# Altium PCB PCB-15_19_prototyp.PcbDoc (part 2 of 4)
Units mm, origin at the board's own origin, x right, y up, seen from the top; angles counter-clockwise.
Board outline 190 x 150 mm, 8 copper layers (Top Layer, VCC3V3, Internal Plane 1, Internal Plane 2, Mid-Layer 1, GND, Mid-Layer 2, Bottom Layer), stack 1.301 mm thick; 129 components, 396 nets, 1206 pads, 700 vias.
Unrouted connection lines stored in the file: 9.
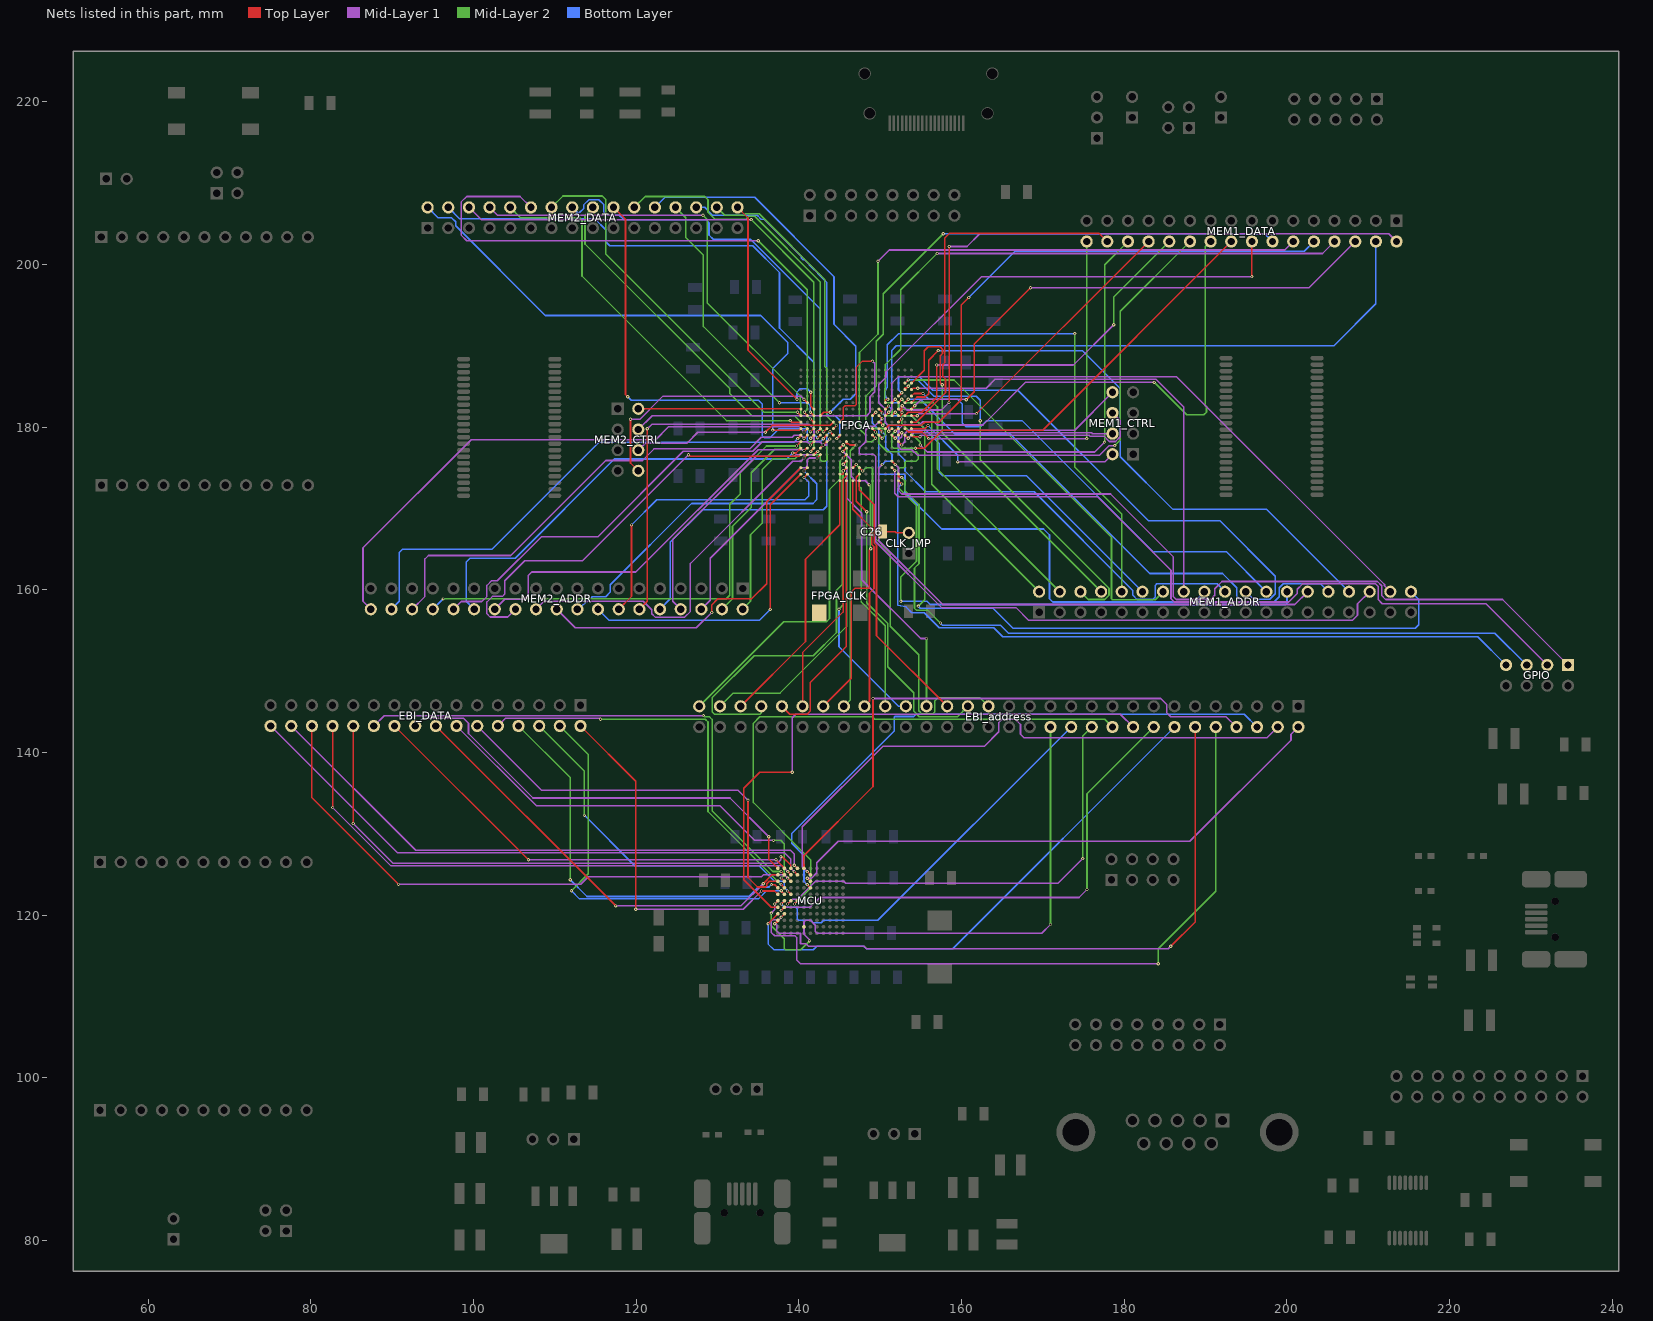
[diagram p8: the nets of this part, all layers, seen from the top]

## Via types
v1: diameter 0.4, hole 0.2, Top Layer to Bottom Layer, 696 vias
v2: diameter 7, hole 5, Top Layer to Bottom Layer, 4 vias

## Nets (pads, with @x,y where several pads share a name; then routed paths per layer and width w, separated by ;. In a path a pad name is that pad's centre, name@x,y a point inside that pad or via, vN(x,y) a via of type N, cw(c..) or ccw(c..) an arc to the next point about the centre after c; other vN are vias at no path point) (continued)
A17: EBI_address.26 MCU.F1 | length 69.4
  Top Layer w0.2: v1(137.036,121.361) MCU.F1@137.429,121.754
  Mid-Layer 1 w0.2: v1(136.601,120.244) 137.036,120.679 v1(137.036,121.361) ; v1(141.326,116.829) 141.326,116.942 140.64,117.628 140.64,119.177 140.811,119.348 141.427,119.348 142.011,118.764 142.011,117.983 142.24,117.754 169.849,117.754 v1(170.942,118.847)
  Mid-Layer 2 w0.2: v1(136.601,120.244) 136.627,120.218 136.627,118.685 138.216,117.095 138.216,115.898 138.379,115.735 140.231,115.735 v1(141.326,116.829) ; v1(170.942,118.847) EBI_address.26@170.942,143.129
A18: EBI_address.24 MCU.F2 | length 47.8
  Top Layer w0.2: v1(137.846,121.361) 137.846,121.371 MCU.F2@138.229,121.754
  Bottom Layer w0.2: v1(137.846,121.361) 138.252,120.955 139.598,120.955 139.829,120.724 139.829,119.482 139.957,119.354 141.453,119.354 141.731,119.075 142.747,119.075 143.023,119.351 149.704,119.351 EBI_address.24@173.482,143.129
A19: EBI_address.22 MCU.F3 | length 56
  Top Layer w0.2: v1(138.608,121.361) 138.636,121.361 MCU.F3@139.029,121.754
  Mid-Layer 1 w0.2: v1(138.608,121.361) 139.217,121.971 139.871,121.971 142.055,124.154 145.518,124.154 145.759,123.912 171.868,123.912 v1(174.904,126.949)
  Mid-Layer 2 w0.2: v1(174.904,126.949) 174.904,142.011 EBI_address.22@176.022,143.129
A20: EBI_address.20 MCU.F4 | length 71.5
  Top Layer w0.2: v1(139.471,121.361) 139.471,121.396 MCU.F4@139.829,121.754
  Mid-Layer 2 w0.2: v1(139.471,121.361) 141.478,123.368 141.478,126.771 134.417,133.833 134.417,143.586 135.21,144.379 149.047,144.379 149.332,144.094 177.597,144.094 EBI_address.20@178.562,143.129
A21: EBI_address.18 MCU.G1 | length 73.1
  Top Layer w0.2: MCU.G1@137.429,120.954 136.627,120.954 133.223,124.358 133.223,135.585 135.204,137.566 v1(139.192,137.566)
  Mid-Layer 1 w0.2: v1(139.192,137.566) 139.192,144.272 139.624,144.704 179.527,144.704 EBI_address.18@181.102,143.129
A22: EBI_address.16 MCU.G2 | length 62.6
  Top Layer w0.2: v1(137.82,120.574) 137.849,120.574 MCU.G2@138.229,120.954
  Mid-Layer 1 w0.2: v1(137.82,120.574) 138.201,120.955 141.372,120.955 142.578,122.16 174.459,122.16 v1(175.438,123.139)
  Mid-Layer 2 w0.2: v1(175.438,123.139) 175.438,134.925 EBI_address.16@183.642,143.129
A23: EBI_address.14 MCU.H1 | length 66.1
  Top Layer w0.2: v1(136.22,118.945) MCU.H1@137.429,120.154
  Bottom Layer w0.2: v1(136.22,118.945) 136.22,116.455 136.941,115.735 141.784,115.735 142.229,116.18 147.996,116.18 148.315,115.861 158.914,115.861 EBI_address.14@186.182,143.129
A24: EBI_address.12 MCU.J1 | length 80.2
  Top Layer w0.2: v1(137.033,118.948) 137.236,119.151 137.429,119.151 MCU.J1@137.429,119.354 ; v1(185.725,116.154) 188.722,119.151 EBI_address.12@188.722,143.129
  Mid-Layer 1 w0.2: v1(137.033,118.948) 137.16,118.948 137.287,118.821 137.287,118.033 137.566,117.754 139.598,117.754 140.198,117.754 140.198,116.476 140.876,116.476 141.198,116.154 148.021,116.154 148.315,115.861 185.431,115.861 v1(185.725,116.154)
A25: EBI_address.10 MCU.H2 | length 86.2
  Top Layer w0.2: v1(137.82,119.736) 138.229,120.144 MCU.H2@138.229,120.154
  Mid-Layer 1 w0.2: v1(137.82,119.736) 137.82,119.685 137.566,119.431 136.754,119.431 136.627,119.304 136.627,117.856 137.033,117.45 139.522,117.45 139.725,117.246 139.725,114.503 140.208,114.021 v1(184.201,114.021)
  Mid-Layer 2 w0.2: v1(184.201,114.021) 184.201,115.875 191.262,122.936 EBI_address.10@191.262,143.129
BACKUP.GPIO0: FPGA.R15 GPIO.1 | length 101
  Top Layer w0.2: FPGA.R15@151.447,175.807 v1(151.842,175.412)
  Mid-Layer 1 w0.2: v1(151.842,175.412) 152.247,175.007 152.247,172.192 152.668,171.771 178.318,171.771 186.055,164.033 186.055,159.131 186.385,158.801 190.627,158.801 191.135,159.309 191.135,160.122 192.029,161.016 211.135,161.016 211.658,160.493 211.658,159.283 212.141,158.801 226.517,158.801 GPIO.1@234.569,150.749
BACKUP.GPIO1: FPGA.T15 GPIO.3 | length 97.4
  Top Layer w0.2: FPGA.T15@151.447,175.007 v1(151.779,174.675)
  Mid-Layer 1 w0.2: v1(151.779,174.675) 151.779,171.868 152.229,171.418 176.714,171.418 185.75,162.382 185.75,158.902 186.157,158.496 200.228,158.496 201.27,159.537 201.27,160.071 201.915,160.716 210.922,160.716 211.226,160.411 211.226,158.801 211.734,158.293 224.485,158.293 GPIO.3@232.029,150.749
BACKUP.GPIO2: FPGA.U16 GPIO.5 | length 96.1
  Top Layer w0.2: FPGA.U16@152.247,174.207 152.247,173.914 152.527,173.914 v1(152.654,173.787)
  Mid-Layer 2 w0.2: v1(152.654,173.787) 153.054,173.387 153.054,172.853 153.041,172.841 153.041,172.212 154.774,170.479 154.774,163.209 154.229,162.664 154.229,157.704 154.432,157.501 155.808,157.501 v1(157.404,155.905)
  Bottom Layer w0.2: v1(157.404,155.905) 157.658,155.651 164.795,155.651 165.786,154.661 225.577,154.661 GPIO.5@229.489,150.749
BACKUP.GPIO3: FPGA.V16 GPIO.7 | length 93.5
  Top Layer w0.2: FPGA.V16@152.247,173.407 v1(152.654,173)
  Bottom Layer w0.2: v1(152.654,173) 152.152,172.498 152.152,158.09 153.187,157.886 153.899,157.175 155.423,157.175 157.277,155.321 163.982,155.321 165.075,154.229 223.469,154.229 GPIO.7@226.949,150.749
CLK: C26.2 CLK_JMP.2 | length 3.3
  Top Layer w0.2: C26.2@150.321,167.148 151.841,167.148 151.99,166.999 CLK_JMP.2@153.524,166.999
CS0: EBI_address.6 MCU.D6 | length 72.6
  Top Layer w0.2: v1(141.021,123.749) 141.034,123.749 MCU.D6@141.429,123.354
  Bottom Layer w0.2: v1(141.021,123.749) 140.633,124.136 140.633,126.232 140.595,126.27 140.595,127.338 139.116,128.818 139.116,130.032 151.724,142.64 151.724,144.332 151.81,144.419 154.127,144.419 154.412,144.704 194.767,144.704 EBI_address.6@196.342,143.129
CS1: EBI_address.8 MCU.A5 | length 71.2
  Top Layer w0.2: MCU.A5@140.629,125.754 140.629,126.27 140.595,126.303 140.595,127.286 149.123,135.814 v1(149.123,146.634)
  Mid-Layer 1 w0.2: v1(149.123,146.634) 184.506,146.634 185.217,145.923 185.217,144.907 185.725,144.399 192.532,144.399 EBI_address.8@193.802,143.129
DATA0: EBI_DATA.32 MCU.B4 | length 73
  Top Layer w0.2: v1(139.421,125.349) 139.434,125.349 MCU.B4@139.829,124.954
  Mid-Layer 1 w0.2: EBI_DATA.32@75.057,143.256 90.653,127.66 138.242,127.66 139.029,126.873 139.029,125.741 v1(139.421,125.349)
DATA0.ADDR0: FPGA.F15 MEM1_ADDR.2 | length 33.5
  Top Layer w0.2: FPGA.F15@151.447,183.007 v1(151.847,183.407)
  Mid-Layer 2 w0.2: v1(151.847,183.407) 152.247,183.008 152.247,182.36 152.394,182.213 153.079,182.213 153.086,182.207 155.715,182.207 156.356,181.566 156.356,172.955 MEM1_ADDR.2@169.545,159.766
DATA0.ADDR1: FPGA.F16 MEM1_ADDR.4 | length 34.3
  Top Layer w0.2: FPGA.F16@152.247,183.007 v1(152.654,183.413)
  Mid-Layer 2 w0.2: v1(152.654,183.413) 153.06,183.007 153.835,183.007 153.854,183.026 156.496,183.026 157.048,182.474 157.048,174.803 MEM1_ADDR.4@172.085,159.766
DATA0.ADDR2: FPGA.C17 MEM1_ADDR.6 | length 45.1
  Top Layer w0.2: FPGA.C17@153.047,185.407 v1(153.441,185.801)
  Mid-Layer 2 w0.2: v1(162.306,180.772) 162.306,175.997 178.13,160.172 178.13,159.309 177.622,158.801 175.59,158.801 MEM1_ADDR.6@174.625,159.766
  Bottom Layer w0.2: v1(153.441,185.801) 154.615,185.801 156.621,183.794 161.798,183.794 162.306,183.286 v1(162.306,180.772)
DATA0.ADDR3: FPGA.C18 MEM1_ADDR.8 | length 45.3
  Top Layer w0.2: FPGA.C18@153.847,185.407 155.423,186.983 155.423,189.382 155.905,189.865 157.378,189.865 157.658,189.586 157.658,189.052 157.378,188.773 157.378,185.445 v1(157.632,185.191)
  Mid-Layer 2 w0.2: v1(157.632,185.191) 157.632,179.299 MEM1_ADDR.8@177.165,159.766
DATA0.ADDR4: FPGA.F14 MEM1_ADDR.10 | length 65.3
  Top Layer w0.2: FPGA.F14@150.647,183.007 150.647,183.261 150.8,183.413 v1(150.952,183.413)
  Mid-Layer 2 w0.2: v1(173.939,191.491) 173.939,175.082 179.705,169.316 MEM1_ADDR.10@179.705,159.766
  Bottom Layer w0.2: v1(150.952,183.413) 150.622,183.744 150.622,184.607 150.876,184.861 150.876,190.119 152.248,191.491 v1(173.939,191.491)
DATA0.ADDR5: FPGA.G14 MEM1_ADDR.12 | length 43.7
  Top Layer w0.2: FPGA.G14@150.647,182.207 v1(151.034,182.595)
  Bottom Layer w0.2: v1(151.034,182.595) 151.46,182.169 151.46,181.534 151.587,181.407 153.86,181.407 157.277,177.991 157.277,174.422 157.683,174.015 167.996,174.015 MEM1_ADDR.12@182.245,159.766
DATA0.ADDR6: FPGA.D17 MEM1_ADDR.14 | length 48.4
  Top Layer w0.2: FPGA.D17@153.047,184.607 153.047,184.81 153.238,184.81 v1(153.441,185.014)
  Mid-Layer 2 w0.2: v1(153.441,185.014) 154.222,185.795 159.085,185.795 178.435,166.444 178.435,158.902 178.55,158.788 183.807,158.788 MEM1_ADDR.14@184.785,159.766
DATA0.ADDR7: FPGA.D18 MEM1_ADDR.16 | length 58.1
  Top Layer w0.2: FPGA.D18@153.847,184.607 154.025,184.785 v1(154.61,184.785)
  Mid-Layer 1 w0.2: v1(154.61,184.785) 163.043,184.785 164.16,185.903 183.896,185.903 187.325,182.474 MEM1_ADDR.16@187.325,159.766
DATA0.ADDR8: FPGA.H12 MEM1_ADDR.18 | length 61.5
  Top Layer w0.2: FPGA.H12@149.047,181.407 v1(149.454,181.813)
  Bottom Layer w0.2: v1(149.454,181.813) 149.047,181.407 149.047,180.467 149.835,179.679 149.835,174.334 149.962,174.207 152.908,174.207 153.054,174.061 153.054,172.841 153.041,172.828 153.041,171.98 157.559,167.462 170.078,167.462 170.815,166.726 170.815,158.902 171.221,158.496 188.595,158.496 MEM1_ADDR.18@189.865,159.766
DATA0.ADDR9: FPGA.G13 MEM1_ADDR.20 | length 57.9
  Top Layer w0.2: FPGA.G13@149.847,182.207 150.241,181.813 v1(150.241,181.737)
  Bottom Layer w0.2: v1(150.241,181.737) 150.647,181.331 150.647,180.518 150.926,180.238 152.044,180.238 152.248,180.035 152.248,176.708 153.047,175.908 153.047,174.6 155.612,172.034 168.935,172.034 181.077,159.893 181.077,159.309 181.585,158.801 183.515,158.801 183.82,159.106 183.82,160.528 184.023,160.731 191.44,160.731 MEM1_ADDR.20@192.405,159.766
DATA0.ADDR10: FPGA.E16 MEM1_ADDR.22 | length 65.6
  Top Layer w0.2: FPGA.E16@152.247,183.807 v1(152.647,184.207)
  Bottom Layer w0.2: v1(152.647,184.207) 152.247,184.608 152.247,186.054 152.4,186.207 154.788,186.207 156.464,184.531 166.929,184.531 182.956,168.504 191.745,168.504 198.577,161.671 198.577,159.512 197.881,158.816 195.895,158.816 MEM1_ADDR.22@194.945,159.766
DATA0.ADDR11: FPGA.E18 MEM1_ADDR.24 | length 55.9
  Top Layer w0.2: FPGA.E18@153.847,183.807 154.173,184.133 v1(155.27,184.133)
  Bottom Layer w0.2: v1(155.27,184.133) 155.964,183.439 159.512,183.439 160.071,182.88 160.071,180.518 160.528,180.061 162.357,180.061 163.093,180.797 167.437,180.797 183.54,164.694 192.557,164.694 MEM1_ADDR.24@197.485,159.766
DATA0.ADDR12: FPGA.K12 MEM1_ADDR.26 | length 78.5
  Top Layer w0.2: FPGA.K12@149.047,179.807 149.428,179.426 v1(149.428,179.4)
  Mid-Layer 2 w0.2: v1(149.428,179.4) 149.835,178.994 149.835,178.003 150.876,176.962 154.432,176.962 154.661,176.733 154.661,176.047 154.432,175.819 153.199,175.819 153.047,175.666 153.047,175.146 152.908,175.007 152.4,175.007 152.197,174.804 152.197,172.618 154.474,170.341 154.474,163.509 152.552,161.587 v1(152.552,158.598)
  Bottom Layer w0.2: v1(152.552,158.598) 155.753,158.598 156.159,158.191 199.847,158.191 200.025,158.369 MEM1_ADDR.26@200.025,159.766
DATA0.ADDR13: FPGA.K13 MEM1_ADDR.28 | length 72.1
  Top Layer w0.2: FPGA.K13@149.847,179.807 150.241,179.413 v1(150.241,179.4)
  Mid-Layer 1 w0.2: v1(150.241,175.387) 149.835,174.981 149.835,166.04 157.683,158.191 200.99,158.191 MEM1_ADDR.28@202.565,159.766
  Bottom Layer w0.2: v1(150.241,175.387) 150.661,175.807 151.296,175.807 151.46,175.971 151.46,176.657 150.673,177.444 150.673,178.968 v1(150.241,179.4)
DATA0.ADDR14: FPGA.F17 MEM1_ADDR.30 | length 65.1
  Top Layer w0.2: FPGA.F17@153.047,183.007 153.441,183.401 v1(153.441,183.413)
  Bottom Layer w0.2: v1(153.441,183.413) 154.915,183.413 159.182,179.146 165.989,179.146 183.134,162.001 192.1,162.001 193.853,160.249 193.853,159.207 194.544,158.516 198.435,158.516 199.06,159.141 199.06,160.249 199.542,160.731 204.14,160.731 MEM1_ADDR.30@205.105,159.766
DATA0.ADDR15: FPGA.F18 MEM1_ADDR.32 | length 76
  Top Layer w0.2: FPGA.F18@153.847,183.007 154.533,183.693 155.55,183.693 155.956,184.099 155.956,188.214 v1(157.15,189.408)
  Bottom Layer w0.2: v1(157.15,189.408) 174.854,189.408 179.527,184.734 179.527,176.352 186.004,169.875 197.536,169.875 MEM1_ADDR.32@207.645,159.766
DATA0.ADDR16: FPGA.H13 MEM1_ADDR.34 | length 86
  Top Layer w0.2: FPGA.H13@149.847,181.407 v1(150.241,181.013)
  Mid-Layer 1 w0.2: v1(150.241,181.013) 149.314,180.086 148.692,180.086 148.234,179.629 148.234,178.206 147.447,177.419 147.447,176.784 147.563,176.668 149.178,176.668 149.46,176.387 149.46,165.904 157.553,157.81 166.7,157.81 168.25,156.261 208.077,156.261 208.686,156.87 208.686,158.267 MEM1_ADDR.34@210.185,159.766
DATA0.ADDR17: FPGA.H14 MEM1_ADDR.36 | length 77
  Top Layer w0.2: FPGA.H14@150.647,181.407 v1(151.054,181.813)
  Mid-Layer 1 w0.2: v1(151.054,181.813) 151.447,182.206 151.447,185.407 152.247,186.207 153.035,186.207 153.038,186.204 186.44,186.204 212.005,160.639 212.005,160.486 MEM1_ADDR.36@212.725,159.766
DATA0.ADDR18: FPGA.H15 MEM1_ADDR.38 | length 94.5
  Top Layer w0.2: FPGA.H15@151.447,181.407 151.853,181.813 v1(151.867,181.813)
  Mid-Layer 2 w0.2: v1(151.867,181.813) 152.273,181.407 153.86,181.407 155.467,179.8 155.467,158.769 v1(154.686,157.988)
  Bottom Layer w0.2: v1(154.686,157.988) 154.94,157.734 163.881,157.734 166.345,155.27 215.798,155.27 216.23,155.702 216.23,158.801 MEM1_ADDR.38@215.265,159.766
DATA0.BUS0: FPGA.H16 MEM1_DATA.2 | length 83.1
  Top Layer w0.2: FPGA.H16@152.247,181.407 152.502,181.407 152.629,181.534 152.629,182.524 v1(152.73,182.626) ; v1(158.471,183.032) 158.496,183.058 v1(158.496,202.209)
  Mid-Layer 1 w0.2: v1(152.73,182.626) 153.264,182.093 157.531,182.093 v1(158.471,183.032) ; v1(158.496,202.209) 160.68,202.209 162.255,203.784 212.522,203.784 MEM1_DATA.2@213.487,202.819
DATA0.BUS1: FPGA.G16 MEM1_DATA.4 | length 78.6
  Top Layer w0.2: FPGA.G16@152.247,182.207 152.286,182.207 v1(152.679,181.813)
  Bottom Layer w0.2: v1(152.679,181.813) 152.679,182.016 152.298,182.397 152.298,182.905 152.197,183.007 151.599,183.007 151.447,183.159 151.447,189.445 151.994,189.992 205.791,189.992 210.947,195.148 MEM1_DATA.4@210.947,202.819
DATA0.BUS2: FPGA.G18 MEM1_DATA.6 | length 66.6
  Top Layer w0.2: FPGA.G18@153.847,182.207 v1(154.266,182.626) ; v1(160.579,183.363) 161.569,184.353 161.569,190.221 v1(168.478,197.129)
  Mid-Layer 1 w0.2: v1(154.266,182.626) 155.072,183.432 160.509,183.432 v1(160.579,183.363) ; v1(168.478,197.129) 202.717,197.129 MEM1_DATA.6@208.407,202.819
DATA0.BUS3: FPGA.J13 MEM1_DATA.8 | length 75.5
  Top Layer w0.2: FPGA.J13@149.847,180.607 150.114,180.607 150.114,180.442 v1(150.317,180.238)
  Mid-Layer 1 w0.2: v1(156.997,201.346) 204.394,201.346 MEM1_DATA.8@205.867,202.819
  Mid-Layer 2 w0.2: v1(150.317,180.238) 150.644,180.565 150.644,181.283 150.774,181.413 151.314,181.413 151.46,181.559 151.46,182.194 151.435,182.22 151.435,182.88 151.308,183.007 150.774,183.007 150.546,183.236 150.546,184.506 150.647,184.607 150.647,187.706 152.527,189.586 152.527,196.875 v1(156.997,201.346)
DATA0.BUS4: FPGA.K14 MEM1_DATA.10 | length 69
  Top Layer w0.2: FPGA.K14@150.647,179.807 151.053,180.213 155.084,180.213 155.48,180.609 157.215,180.609 159.969,183.363 159.969,195.021 v1(160.884,195.936)
  Bottom Layer w0.2: v1(160.884,195.936) 166.573,201.625 202.133,201.625 MEM1_DATA.10@203.327,202.819
DATA0.BUS5: FPGA.L12 MEM1_DATA.12 | length 77.3
  Top Layer w0.2: FPGA.L12@149.047,179.007 v1(149.428,178.626)
  Mid-Layer 1 w0.2: v1(149.733,200.381) 151.13,201.778 199.746,201.778 MEM1_DATA.12@200.787,202.819
  Mid-Layer 2 w0.2: v1(149.428,178.626) 149.009,178.206 148.45,178.206 148.247,178.41 148.247,178.981 147.447,179.781 147.447,186.998 147.464,187.016 147.464,189.171 149.733,191.44 v1(149.733,200.381)
DATA0.BUS6: FPGA.L13 MEM1_DATA.14 | length 72.7
  Top Layer w0.2: FPGA.L13@149.847,179.007 v1(150.241,178.613)
  Mid-Layer 2 w0.2: v1(150.241,178.613) 150.647,179.019 150.647,179.629 150.444,179.832 148.742,179.832 148.247,180.327 148.247,183.82 149.504,185.077 149.504,190.551 150.374,191.42 150.374,196.399 v1(157.759,203.784)
  Bottom Layer w0.2: v1(157.759,203.784) 197.282,203.784 MEM1_DATA.14@198.247,202.819
DATA0.BUS7: FPGA.K15 MEM1_DATA.16 | length 62.9
  Top Layer w0.2: v1(151.054,179.476) 151.384,179.807 FPGA.K15@151.447,179.807 ; v1(195.707,198.501) MEM1_DATA.16@195.707,202.819
  Mid-Layer 1 w0.2: v1(151.054,179.476) 151.054,180.136 150.647,180.543 150.647,182.195 149.835,183.007 149.835,185.242 150.724,186.131 150.724,186.766 162.458,198.501 v1(195.707,198.501)
DATA0.BUS8: FPGA.K16 MEM1_DATA.18 | length 54.9
  Top Layer w0.2: v1(151.841,179.476) 152.172,179.807 FPGA.K16@152.247,179.807 ; v1(154.33,177.394) 155.421,177.394 157.657,179.629 169.977,179.629 MEM1_DATA.18@193.167,202.819
  Mid-Layer 2 w0.2: v1(151.841,179.476) 151.435,179.07 151.435,177.597 151.638,177.394 v1(154.33,177.394)
DATA0.BUS9: FPGA.L15 MEM1_DATA.20 | length 65.5
  Top Layer w0.2: FPGA.L15@151.447,179.007 v1(151.841,178.613)
  Mid-Layer 1 w0.2: v1(151.841,178.613) 152.248,179.019 152.248,179.705 152.806,180.264 154.813,180.264 155.169,180.619 156.642,180.619 156.997,180.264 162.636,180.264 167.869,185.496 v1(183.693,185.496)
  Mid-Layer 2 w0.2: v1(183.693,185.496) 187.681,181.508 189.789,181.508 190.119,181.839 190.119,182.474 189.967,182.626 189.967,202.159 MEM1_DATA.20@190.627,202.819
DATA0.BUS10: FPGA.L16 MEM1_DATA.22 | length 58.9
  Top Layer w0.2: FPGA.L16@152.247,179.007 152.539,179.299 v1(152.654,179.299)
  Mid-Layer 1 w0.2: v1(152.654,179.299) 152.654,178.817 152.247,178.41 152.247,177.572 152.603,177.216 153.899,177.216 154.584,176.53 176.974,176.53 178.168,177.724 v1(178.841,177.724)
  Mid-Layer 2 w0.2: v1(178.841,177.724) 179.527,178.41 179.527,194.259 MEM1_DATA.22@188.087,202.819
DATA0.BUS11: FPGA.H17 MEM1_DATA.24 | length 45.7
  Top Layer w0.2: FPGA.H17@153.047,181.407 153.453,181.813 155.118,181.813 156.972,183.667 v1(156.972,187.63)
  Mid-Layer 1 w0.2: v1(156.972,187.63) 173.761,187.63 v1(178.714,192.583)
  Mid-Layer 2 w0.2: v1(178.714,192.583) 178.714,195.986 MEM1_DATA.24@185.547,202.819
DATA0.BUS12: FPGA.H18 MEM1_DATA.26 | length 38
  Top Layer w0.2: FPGA.H18@153.847,181.407 v1(154.559,181.407) ; v1(161.849,181.661) MEM1_DATA.26@183.007,202.819
  Mid-Layer 1 w0.2: v1(154.559,181.407) 154.813,181.661 v1(161.849,181.661)
DATA0.BUS13: FPGA.J16 MEM1_DATA.28 | length 54.1
  Top Layer w0.2: FPGA.J16@152.247,180.607 152.64,181 v1(152.654,181)
  Mid-Layer 1 w0.2: v1(154.94,177.8) 155.807,176.933 176.374,176.933 v1(177.597,178.156)
  Mid-Layer 2 w0.2: v1(152.654,181) 152.654,180.429 154.94,178.143 v1(154.94,177.8) ; v1(177.597,178.156) 177.597,199.949 MEM1_DATA.28@180.467,202.819
DATA0.BUS14: FPGA.J18 MEM1_DATA.30 | length 45.6
  Top Layer w0.2: FPGA.J18@153.847,180.607 154.423,180.607 158.039,184.223 158.039,185.903 157.683,186.258 157.683,187.655 157.963,187.935 157.963,203.276 158.521,203.835 176.911,203.835 MEM1_DATA.30@177.927,202.819
DATA0.BUS15: FPGA.K17 MEM1_DATA.32 | length 47.1
  Top Layer w0.2: FPGA.K17@153.047,179.807 153.454,179.4 155.143,179.4 v1(155.956,178.587)
  Mid-Layer 1 w0.2: v1(155.956,178.587) v1(175.387,178.587)
  Mid-Layer 2 w0.2: v1(175.387,178.587) MEM1_DATA.32@175.387,202.819
DATA0.ENABLE: FPGA.M16 MEM1_CTRL.8 | length 29.7
  Top Layer w0.2: FPGA.M16@152.247,178.207 v1(152.654,177.8)
  Mid-Layer 1 w0.2: v1(152.654,177.8) 153.035,178.181 153.035,179.172 153.492,179.629 173.914,179.629 MEM1_CTRL.8@178.562,184.277
DATA0.LB: FPGA.L17 MEM1_CTRL.4 | length 26
  Top Layer w0.2: FPGA.L17@153.047,179.007 v1(153.441,178.613)
  Mid-Layer 1 w0.2: v1(153.441,178.613) 154.116,179.287 175.997,179.287 176.087,179.197 MEM1_CTRL.4@178.562,179.197
DATA0.UB: FPGA.K18 MEM1_CTRL.2 | length 27.6
  Top Layer w0.2: FPGA.K18@153.847,179.807 155.499,179.807 v1(155.88,180.188)
  Mid-Layer 1 w0.2: v1(159.537,175.717) 177.622,175.717 MEM1_CTRL.2@178.562,176.657
  Bottom Layer w0.2: v1(155.88,180.188) 159.537,176.53 v1(159.537,175.717)
DATA0.WRITE: FPGA.L18 MEM1_CTRL.6 | length 29.7
  Top Layer w0.2: FPGA.L18@153.847,179.007 154.038,178.816 v1(154.896,178.816)
  Mid-Layer 1 w0.2: v1(154.896,178.816) 155.067,178.987 175.698,178.987 175.793,178.892 177.523,178.892 178.184,178.232 178.943,178.232 179.527,178.816 179.527,180.772 MEM1_CTRL.6@178.562,181.737
DATA1: EBI_DATA.30 MCU.A4 | length 70.3
  Top Layer w0.2: v1(139.446,126.137) MCU.A4@139.829,125.754
  Mid-Layer 1 w0.2: EBI_DATA.30@77.597,143.256 92.888,127.965 138.989,127.965 139.446,127.508 v1(139.446,126.137)
DATA1.ADDR0: FPGA.N4 MEM2_ADDR.2 | length 32.1
  Top Layer w0.2: FPGA.N4@142.647,177.407 v1(143.04,177.8)
  Mid-Layer 1 w0.2: v1(143.04,177.8) 143.408,177.8 143.408,178.13 v1(143.815,178.537)
  Mid-Layer 2 w0.2: MEM2_ADDR.2@133.096,157.607 134.061,158.572 134.061,166.751 135.509,168.199 135.509,174.777 136.83,176.098 139.522,176.098 140.03,176.606 142.443,176.606 142.646,176.403 142.646,175.997 142.85,175.793 143.256,175.793 143.459,175.997 143.459,176.606 143.434,176.632 143.434,178.156 v1(143.815,178.537)
DATA1.ADDR1: FPGA.N3 MEM2_ADDR.4 | length 29.7
  Top Layer w0.2: v1(141.453,177.013) FPGA.N3@141.847,177.407
  Mid-Layer 2 w0.2: MEM2_ADDR.4@130.556,157.607 131.851,158.902 131.851,167.818 134.137,170.104 134.137,174.371 137.033,177.267 140.005,177.267 140.132,177.394 140.132,178.003 140.336,178.207 141.63,178.207 141.834,178.004 141.834,177.394 v1(141.453,177.013)
DATA1.ADDR2: FPGA.P4 MEM2_ADDR.6 | length 26
  Top Layer w0.2: v1(142.24,176.2) FPGA.P4@142.647,176.607
  Mid-Layer 1 w0.2: MEM2_ADDR.6@128.016,157.607 129.108,158.699 129.108,163.881 140.233,175.006 140.818,175.006 141.053,175.241 141.053,175.971 141.281,176.2 v1(142.24,176.2)
DATA1.ADDR3: FPGA.P3 MEM2_ADDR.8 | length 31.9
  Top Layer w0.2: FPGA.P3@141.847,176.607 142.253,177.013 v1(142.316,177.013)
  Mid-Layer 1 w0.2: MEM2_ADDR.8@125.476,157.607 124.511,158.572 124.511,166.167 134.753,176.409 139.446,176.409 139.643,176.606 141.91,176.606 v1(142.316,177.013)
DATA1.ADDR4: FPGA.L6 MEM2_ADDR.10 | length 39.8
  Top Layer w0.2: v1(143.834,179.42) FPGA.L6@144.247,179.007
  Bottom Layer w0.2: MEM2_ADDR.10@122.936,157.607 124.206,158.877 124.206,165.862 128.194,169.85 143.015,169.85 143.44,170.275 143.44,175.736 143.447,175.743 143.447,178.137 143.415,178.169 143.415,179 v1(143.834,179.42)
DATA1.ADDR5: FPGA.M5 MEM2_ADDR.12 | length 46.9
  Top Layer w0.2: MEM2_ADDR.12@120.396,157.607 121.361,158.572 v1(121.361,179.781) ; v1(142.977,177.8) 143.04,177.8 FPGA.M5@143.447,178.207
  Mid-Layer 1 w0.2: v1(121.361,179.781) 121.909,180.329 141.286,180.329 141.859,179.756 141.859,178.388 142.037,178.21 142.567,178.21 v1(142.977,177.8)
DATA1.ADDR6: FPGA.U2 MEM2_ADDR.14 | length 37.4
  Top Layer w0.2: MEM2_ADDR.14@117.856,157.607 119.431,159.182 v1(119.431,167.97) ; v1(140.64,173.812) 140.652,173.812 FPGA.U2@141.047,174.207
  Bottom Layer w0.2: v1(119.431,167.97) 122.53,171.069 140.767,171.069 141.199,171.501 141.199,173.253 v1(140.64,173.812)
DATA1.ADDR7: FPGA.U1 MEM2_ADDR.16 | length 40.5
  Top Layer w0.2: v1(136.474,157.582) 136.474,170.434 FPGA.U1@140.247,174.207
  Bottom Layer w0.2: MEM2_ADDR.16@115.316,157.607 116.662,156.261 135.153,156.261 v1(136.474,157.582)
DATA1.ADDR8: FPGA.T2 MEM2_ADDR.18 | length 40.2
  Top Layer w0.2: v1(140.64,174.6) FPGA.T2@141.047,175.007
  Bottom Layer w0.2: MEM2_ADDR.18@112.776,157.607 114.025,158.572 114.61,159.156 116.256,159.156 116.815,159.715 116.815,160.61 126.817,170.612 141.738,170.612 142.221,171.094 142.221,173.018 v1(140.64,174.6)
DATA1.ADDR9: FPGA.T1 MEM2_ADDR.20 | length 45.5
  Top Layer w0.2: v1(129.286,157.201) 129.286,158.115 130.048,158.877 134.188,158.877 136.042,160.731 136.042,170.802 FPGA.T1@140.247,175.007
  Mid-Layer 1 w0.2: MEM2_ADDR.20@110.236,157.607 112.522,155.321 127.406,155.321 v1(129.286,157.201)
DATA1.ADDR10: FPGA.P2 MEM2_ADDR.22 | length 46.6
  Top Layer w0.2: v1(140.64,176.2) FPGA.P2@141.047,176.607
  Mid-Layer 1 w0.2: MEM2_ADDR.22@107.696,157.607 108.661,158.572 120.879,158.572 121.92,157.531 121.92,157.048 122.326,156.642 125.984,156.642 126.67,157.328 126.67,163.22 139.256,175.807 140.247,175.807 v1(140.64,176.2)
DATA1.ADDR11: FPGA.P1 MEM2_ADDR.24 | length 52.7
  Top Layer w0.2: v1(126.441,176.606) 126.644,176.403 140.043,176.403 FPGA.P1@140.247,176.607
  Mid-Layer 1 w0.2: MEM2_ADDR.24@105.156,157.607 104.206,156.657 102.042,156.657 101.651,157.048 101.651,158.496 102.337,159.182 103.556,159.182 103.861,159.487 103.861,161.117 106.319,163.576 113.411,163.576 v1(126.441,176.606)
DATA1.ADDR12: FPGA.N2 MEM2_ADDR.26 | length 48.2
  Top Layer w0.2: v1(140.64,177.114) 140.868,177.343 140.868,177.407 FPGA.N2@141.047,177.407
  Mid-Layer 1 w0.2: MEM2_ADDR.26@102.616,157.607 103.835,158.826 106.248,158.826 106.731,159.309 106.731,161.747 107.163,162.179 119.964,162.179 135.001,177.216 140.538,177.216 v1(140.64,177.114)
DATA1.ADDR13: FPGA.N1 MEM2_ADDR.28 | length 53.1
  Top Layer w0.2: v1(139.243,176.809) 139.649,176.809 FPGA.N1@140.247,177.407
  Bottom Layer w0.2: MEM2_ADDR.28@100.076,157.607 99.111,158.572 99.111,163.424 99.568,163.881 105.131,163.881 117.323,176.073 138.506,176.073 v1(139.243,176.809)
DATA1.ADDR14: FPGA.M3 MEM2_ADDR.30 | length 54
  Top Layer w0.2: v1(141.427,177.8) 141.44,177.8 FPGA.M3@141.847,178.207
  Mid-Layer 1 w0.2: MEM2_ADDR.30@97.536,157.607 98.486,158.557 101.026,158.557 101.651,159.182 101.651,160.528 102.22,161.097 102.931,161.097 108.356,166.522 115.316,166.522 125.806,177.013 134.341,177.013 135.509,178.181 140.259,178.181 140.285,178.207 141.02,178.207 v1(141.427,177.8)
DATA1.ADDR15: FPGA.M1 MEM2_ADDR.32 | length 61.9
  Top Layer w0.2: v1(139.713,177.673) FPGA.M1@140.247,178.207
  Mid-Layer 2 w0.2: v1(96.266,158.877) 131.089,158.877 131.521,159.309 131.521,170.51 132.791,171.78 132.791,174.447 136.017,177.673 v1(139.713,177.673)
  Bottom Layer w0.2: MEM2_ADDR.32@94.996,157.607 v1(96.266,158.877)
DATA1.ADDR16: FPGA.L2 MEM2_ADDR.34 | length 60.5
  Top Layer w0.2: v1(140.64,178.613) 140.653,178.613 FPGA.L2@141.047,179.007
  Mid-Layer 1 w0.2: MEM2_ADDR.34@92.456,157.607 94.031,159.182 94.031,163.779 94.463,164.211 104.572,164.211 116.256,175.895 120.777,175.895 122.199,177.317 133.96,177.317 135.388,178.746 139.185,178.746 139.446,179.007 140.246,179.007 v1(140.64,178.613)
DATA1.ADDR17: FPGA.L1 MEM2_ADDR.36 | length 62.8
  Top Layer w0.2: v1(139.852,178.587) 140.081,178.816 140.247,178.816 FPGA.L1@140.247,179.007
  Bottom Layer w0.2: MEM2_ADDR.36@89.916,157.607 90.881,158.572 90.881,164.592 91.288,164.998 102.311,164.998 115.443,178.13 139.395,178.13 v1(139.852,178.587)
DATA1.ADDR18: FPGA.K2 MEM2_ADDR.38 | length 69.2
  Top Layer w0.2: v1(140.64,179.4) FPGA.K2@141.047,179.807
  Mid-Layer 1 w0.2: MEM2_ADDR.38@87.376,157.607 86.411,158.572 86.411,165.151 99.715,178.455 122.397,178.455 123.971,180.029 140.011,180.029 v1(140.64,179.4)
DATA1.BUS0: FPGA.K1 MEM2_DATA.2 | length 66.5
  Top Layer w0.2: v1(136.779,179.629) 140.069,179.629 FPGA.K1@140.247,179.807
  Bottom Layer w0.2: MEM2_DATA.2@94.361,207.01 95.631,205.74 97.307,205.74 97.815,205.232 97.815,204.749 108.839,193.726 135.306,193.726 138.633,190.398 138.633,189.052 136.779,187.198 v1(136.779,179.629)
DATA1.BUS1: FPGA.L4 MEM2_DATA.4 | length 67.7
  Top Layer w0.2: v1(142.31,178.67) FPGA.L4@142.647,179.007
  Bottom Layer w0.2: MEM2_DATA.4@96.901,207.01 98.319,205.592 114.93,205.592 116.256,204.267 116.256,202.794 116.764,202.286 134.341,202.286 137.631,198.995 137.631,192.181 141.853,187.96 141.853,183.887 141.834,180.619 141.859,179.121 v1(142.31,178.67)
DATA1.BUS2: FPGA.L3 MEM2_DATA.6 | length 66.1
  Top Layer w0.2: v1(141.453,178.613) FPGA.L3@141.847,179.007
  Mid-Layer 1 w0.2: MEM2_DATA.6@99.441,207.01 100.94,205.511 v1(134.163,205.511)
  Mid-Layer 2 w0.2: v1(134.163,205.511) 141.853,197.822 141.853,183.877 141.847,183.871 141.847,179.007 v1(141.453,178.613)
DATA1.BUS3: FPGA.J3 MEM2_DATA.8 | length 58.1
  Top Layer w0.2: v1(141.427,181) 141.454,181 FPGA.J3@141.847,180.607
  Mid-Layer 1 w0.2: MEM2_DATA.8@101.981,207.01 102.946,206.045 v1(128.219,206.045)
  Mid-Layer 2 w0.2: v1(128.219,206.045) 128.753,205.511 128.753,195.258 140.197,183.813 140.197,183.056 140.247,183.006 140.247,181.559 140.399,181.407 141.021,181.407 v1(141.427,181)
DATA1.BUS4: FPGA.J1 MEM2_DATA.10 | length 50.7
  Top Layer w0.2: v1(138.938,180.797) 139.128,180.607 FPGA.J1@140.247,180.607
  Mid-Layer 2 w0.2: MEM2_DATA.10@104.521,207.01 105.791,205.74 113.055,205.74 113.335,205.461 113.335,198.577 131.115,180.797 v1(138.938,180.797)
DATA1.BUS5: FPGA.H2 MEM2_DATA.12 | length 74.6
  Top Layer w0.2: v1(140.691,181.839) 140.691,181.763 FPGA.H2@141.047,181.407
  Mid-Layer 1 w0.2: MEM2_DATA.12@107.061,207.01 105.715,208.356 99.162,208.356 98.476,207.67 98.476,203.606 99.162,202.921 v1(135.026,202.921)
  Mid-Layer 2 w0.2: v1(135.026,202.921) 141.047,196.9 141.047,182.195 v1(140.691,181.839)
DATA1.BUS6: FPGA.H1 MEM2_DATA.14 | length 46.3
  Top Layer w0.2: v1(139.841,181.813) FPGA.H1@140.247,181.407
  Mid-Layer 2 w0.2: MEM2_DATA.14@109.601,207.01 110.998,208.407 115.824,208.407 116.256,207.975 116.256,201.27 135.712,181.813 v1(139.841,181.813)
DATA1.BUS7: FPGA.K4 MEM2_DATA.16 | length 54.6
  Top Layer w0.2: v1(142.265,179.4) 142.469,179.603 142.647,179.603 FPGA.K4@142.647,179.807
  Bottom Layer w0.2: MEM2_DATA.16@112.141,207.01 112.811,206.34 113.021,206.34 113.539,206.858 113.539,207.3 114.198,207.96 115.418,207.96 116.037,207.34 116.037,206.451 116.444,206.045 117.938,206.045 118.471,205.511 128.549,205.511 128.956,205.105 128.956,203.606 129.464,203.098 134.061,203.098 142.647,194.513 142.647,179.782 v1(142.265,179.4)
DATA1.BUS8: FPGA.K3 MEM2_DATA.18 | length 43.1
  Top Layer w0.2: v1(141.446,179.406) FPGA.K3@141.847,179.807
  Mid-Layer 2 w0.2: MEM2_DATA.18@114.681,207.01 113.716,206.045 113.716,202.514 131.496,184.734 131.496,184.125 134.207,181.413 139.44,181.413 v1(141.446,179.406)
DATA1.BUS9: FPGA.L5 MEM2_DATA.20 | length 55
  Top Layer w0.2: MEM2_DATA.20@117.221,207.01 118.694,205.537 118.694,184.003 v1(118.979,183.718) ; v1(143.002,178.562) FPGA.L5@143.447,179.007
  Bottom Layer w0.2: v1(118.979,183.718) 119.385,183.312 135.052,183.312 135.484,182.88 135.484,178.968 135.738,178.714 136.474,178.714 137.566,179.807 140.818,179.807 141.046,179.578 141.046,178.41 141.249,178.206 141.808,178.206 141.834,178.232 142.672,178.232 v1(143.002,178.562)
DATA1.BUS10: FPGA.K5 MEM2_DATA.22 | length 48.2
  Top Layer w0.2: v1(143.047,179.406) FPGA.K5@143.447,179.807
  Mid-Layer 2 w0.2: MEM2_DATA.22@119.761,207.01 121.107,208.356 128.422,208.356 128.829,207.95 128.829,206.4 129.692,205.537 133.502,205.537 133.877,205.911 134.569,205.911 142.647,197.834 142.647,179.806 v1(143.047,179.406)
DATA1.BUS11: FPGA.H4 MEM2_DATA.24 | length 47.6
  Top Layer w0.2: FPGA.H4@142.647,181.407 143.053,181.813 v1(143.866,181.813)
  Bottom Layer w0.2: MEM2_DATA.24@122.301,207.01 123.551,208.26 134.564,208.26 144.323,198.501 144.323,192.634 147.015,189.941 147.015,184.099 146.329,183.413 145.466,183.413 v1(143.866,181.813)
DATA1.BUS12: FPGA.H3 MEM2_DATA.26 | length 34.6
  Top Layer w0.2: v1(141.427,181.813) 141.441,181.813 FPGA.H3@141.847,181.407
  Mid-Layer 2 w0.2: MEM2_DATA.26@124.841,207.01 126.111,205.74 126.111,203.302 128.27,201.143 128.27,192.354 v1(137.617,183.007)
  Bottom Layer w0.2: v1(137.617,183.007) 141.021,183.007 141.427,182.601 v1(141.427,181.813)
DATA1.BUS13: FPGA.L7 MEM2_DATA.28 | length 41.2
  Top Layer w0.2: v1(144.653,178.587) 144.856,178.791 145.047,178.791 FPGA.L7@145.047,179.007
  Bottom Layer w0.2: MEM2_DATA.28@127.381,207.01 128.422,207.01 129.388,206.045 134.877,206.045 135.226,205.696 135.226,205.68 135.331,205.575 135.674,205.575 140.324,200.925 140.324,200.889 140.333,200.88 140.333,200.762 140.488,200.606 140.643,200.606 141.834,199.415 141.834,199.379 141.87,199.379 142.762,198.487 142.762,198.45 143.447,197.765 143.447,181.622 143.662,181.407 144.488,181.407 145.047,180.848 145.047,178.981 v1(144.653,178.587)
DATA1.BUS14: FPGA.K6 MEM2_DATA.30 | length 36.2
  Top Layer w0.2: FPGA.K6@144.247,179.807 v1(144.628,180.188)
  Mid-Layer 2 w0.2: MEM2_DATA.30@129.921,207.01 130.886,206.045 133.308,206.045 133.474,206.211 135.139,206.211 143.168,198.183 143.168,187.495 143.447,187.216 143.447,181.368 v1(144.628,180.188)
DATA1.BUS15: FPGA.G3 MEM2_DATA.32 | length 31.8
  Top Layer w0.2: MEM2_DATA.32@132.461,207.01 133.756,205.715 133.756,189.433 v1(139.776,183.413) ; v1(141.453,184.277) 141.453,182.601 FPGA.G3@141.847,182.207
  Bottom Layer w0.2: v1(139.776,183.413) 139.776,184.302 140.183,184.709 141.021,184.709 v1(141.453,184.277)
DATA1.ENABLE: FPGA.F2 MEM2_CTRL.8 | length 30
  Top Layer w0.2: v1(119.304,180.975) 119.304,175.59 MEM2_CTRL.8@120.269,174.625 ; v1(140.641,183.413) FPGA.F2@141.047,183.007
  Mid-Layer 1 w0.2: v1(119.304,180.975) 120.472,180.975 123.311,183.813 140.241,183.813 v1(140.641,183.413)
DATA1.LB: FPGA.J7 MEM2_CTRL.4 | length 46.6
  Top Layer w0.2: FPGA.J7@145.047,180.607 145.466,181.026 145.466,182.397 145.694,182.626 146.914,182.626 147.041,182.753 147.041,187.314 147.839,188.112 v1(149.06,188.112)
  Mid-Layer 1 w0.2: MEM2_CTRL.4@120.269,179.705 121.971,181.407 148.336,181.407 148.747,181.818 148.747,183.748 149.341,184.342 149.341,187.832 v1(149.06,188.112)
DATA1.UB: FPGA.G1 MEM2_CTRL.2 | length 20
  Top Layer w0.2: MEM2_CTRL.2@120.269,182.245 140.227,182.245 140.227,182.207 FPGA.G1@140.247,182.207
DATA1.WRITE: FPGA.J6 MEM2_CTRL.6 | length 25.4
  Top Layer w0.2: v1(135.89,179.349) 136.754,180.213 143.853,180.213 FPGA.J6@144.247,180.607
  Mid-Layer 1 w0.2: MEM2_CTRL.6@120.269,177.165 121.133,178.029 126.263,178.029 127.584,179.349 v1(135.89,179.349)
DATA2: EBI_DATA.28 MCU.C3 | length 73
  Top Layer w0.2: EBI_DATA.28@80.137,143.256 80.137,134.417 v1(90.78,123.774) ; v1(138.633,124.55) MCU.C3@139.029,124.154
  Mid-Layer 1 w0.2: v1(90.78,123.774) 113.182,123.774 114.127,124.719 135.418,124.719 135.661,124.963 138.22,124.963 v1(138.633,124.55)
DATA3: EBI_DATA.26 MCU.B3 | length 69.8
  Top Layer w0.2: v1(82.677,133.223) EBI_DATA.26@82.677,143.256 ; v1(138.633,125.35) MCU.B3@139.029,124.954
  Mid-Layer 1 w0.2: v1(82.677,133.223) 89.853,126.047 137.936,126.047 v1(138.633,125.35)
DATA4: EBI_DATA.24 MCU.A3 | length 69.2
  Top Layer w0.2: v1(85.217,131.267) EBI_DATA.24@85.217,143.256 ; v1(137.795,127.178) 137.973,127.178 139.029,126.122 MCU.A3@139.029,125.754
  Mid-Layer 1 w0.2: v1(85.217,131.267) 90.094,126.39 137.389,126.39 137.795,126.797 v1(137.795,127.178)
DATA5: EBI_DATA.22 MCU.B2 | length 65.7
  Top Layer w0.2: v1(137.82,125.363) MCU.B2@138.229,124.954
  Mid-Layer 1 w0.2: EBI_DATA.22@87.757,143.256 89.027,144.526 v1(128.27,144.526)
  Mid-Layer 2 w0.2: v1(128.27,144.526) 128.414,144.382 129.015,144.382 129.337,144.059 129.337,132.817 136.791,125.363 v1(137.82,125.363)
DATA6: EBI_DATA.20 MCU.A2 | length 55.2
  Top Layer w0.2: EBI_DATA.20@90.297,143.256 v1(106.756,126.797) ; v1(137.186,126.797) MCU.A2@138.229,125.754
  Mid-Layer 1 w0.2: v1(106.756,126.797) v1(137.186,126.797)
DATA7: EBI_DATA.18 MCU.A1 | length 55
  Top Layer w0.2: v1(136.296,129.642) 136.296,126.887 MCU.A1@137.429,125.754
  Mid-Layer 1 w0.2: EBI_DATA.18@92.837,143.256 93.802,144.221 98.755,144.221 99.39,143.586 99.39,142.316 107.315,134.391 131.547,134.391 v1(136.296,129.642)
DATA8: EBI_DATA.16 MCU.B1 | length 52.8
  Top Layer w0.2: EBI_DATA.16@95.377,143.256 v1(117.5,121.133) ; v1(135.611,123.85) 136.714,124.954 MCU.B1@137.429,124.954
  Mid-Layer 1 w0.2: v1(117.5,121.133) 132.893,121.133 v1(135.611,123.85)
DATA9: EBI_DATA.14 MCU.C2 | length 51.2
  Top Layer w0.2: v1(137.82,124.562) MCU.C2@138.229,124.154
  Mid-Layer 1 w0.2: EBI_DATA.14@97.917,143.256 107.747,133.426 130.302,133.426 134.544,129.184 v1(136.881,129.184)
  Mid-Layer 2 w0.2: v1(136.881,129.184) 137.77,129.184 138.227,128.727 138.227,124.968 v1(137.82,124.562)
DATA10: EBI_DATA.12 MCU.C1 | length 51.2
  Top Layer w0.2: v1(133.756,134.137) 133.756,124.612 134.918,123.45 135.941,123.45 136.044,123.553 136.044,123.85 136.347,124.154 MCU.C1@137.429,124.154
  Mid-Layer 1 w0.2: EBI_DATA.12@100.457,143.256 108.382,135.331 132.563,135.331 v1(133.756,134.137)
DATA11: EBI_DATA.10 MCU.D2 | length 50.7
  Top Layer w0.2: v1(137.82,123.749) 137.834,123.749 MCU.D2@138.229,123.354
  Mid-Layer 1 w0.2: EBI_DATA.10@102.997,143.256 103.962,144.221 115.494,144.221 v1(115.621,144.094)
  Mid-Layer 2 w0.2: v1(115.621,144.094) 128.118,144.094 128.143,144.069 128.499,144.069 128.829,143.739 128.829,132.74 v1(137.82,123.749)
DATA12: EBI_DATA.8 MCU.D1 | length 48.7
  Top Layer w0.2: v1(136.627,123.749) 137.034,123.749 MCU.D1@137.429,123.354
  Mid-Layer 2 w0.2: EBI_DATA.8@105.537,143.256 111.887,136.906 v1(111.887,124.358)
  Bottom Layer w0.2: v1(111.887,124.358) 113.959,122.287 133.847,122.287 135.007,123.448 136.325,123.448 v1(136.627,123.749)
DATA13: EBI_DATA.6 MCU.E3 | length 43.1
  Top Layer w0.2: v1(138.622,122.961) MCU.E3@139.029,122.554
  Mid-Layer 2 w0.2: EBI_DATA.6@108.077,143.256 113.64,137.693 v1(113.64,132.258)
  Bottom Layer w0.2: v1(113.64,132.258) 119.837,126.06 135.108,126.06 137.013,124.155 138.024,124.155 138.227,123.952 138.227,123.356 v1(138.622,122.961)
DATA14: EBI_DATA.4 MCU.E2 | length 49.8
  Top Layer w0.2: v1(137.846,122.979) 137.846,122.937 MCU.E2@138.229,122.554
  Mid-Layer 2 w0.2: EBI_DATA.4@110.617,143.256 114.122,139.751 114.122,125.07 v1(112.039,122.987)
  Bottom Layer w0.2: v1(112.039,122.987) 113.039,121.987 135.037,121.987 136.029,122.979 v1(137.846,122.979)
DATA15: EBI_DATA.2 MCU.E1 | length 43.9
  Top Layer w0.2: EBI_DATA.2@113.157,143.256 119.964,136.449 v1(119.964,120.726) ; v1(135.407,122.961) 137.022,122.961 MCU.E1@137.429,122.554
  Mid-Layer 1 w0.2: v1(119.964,120.726) 133.172,120.726 v1(135.407,122.961)
E/D: FPGA_CLK.1
EBI.HSNC: MCU.K5
EBI.REN: EBI_address.2 MCU.C6 | length 69.8
  Top Layer w0.2: v1(141.046,124.537) MCU.C6@141.429,124.154
  Mid-Layer 1 w0.2: v1(141.046,124.537) 141.553,124.537 142.215,125.198 142.215,126.433 144.862,129.081 188.078,129.081 200.51,141.513 200.51,142.217 EBI_address.2@201.422,143.129
EBI.WE: EBI_address.4 MCU.B6 | length 73.1
  Top Layer w0.2: v1(141.034,125.349) MCU.B6@141.429,124.954
  Mid-Layer 1 w0.2: v1(141.034,125.349) 140.437,125.946 140.437,130.861 150.343,140.767 162.832,140.767 164.592,142.527 164.592,143.673 164.998,144.079 166.624,144.079 167.259,143.444 167.259,142.24 167.691,141.808 197.561,141.808 EBI_address.4@198.882,143.129
FPGA.A00: EBI_address.59 FPGA.P8 | length 41.5
  Top Layer w0.2: v1(145.44,176.2) FPGA.P8@145.847,176.607
  Mid-Layer 2 w0.2: EBI_address.59@127.762,145.669 138.151,156.058 143.358,156.058 143.764,156.464 143.764,172.314 145.059,173.609 145.059,175.819 v1(145.44,176.2)
FPGA.A01: EBI_address.57 FPGA.N7 | length 42.7
  Top Layer w0.2: FPGA.N7@145.047,177.407 v1(145.466,177.825)
  Mid-Layer 2 w0.2: EBI_address.57@130.302,145.669 131.928,147.295 137.693,147.295 145.872,155.473 145.872,177.419 v1(145.466,177.825)
FPGA.A02: EBI_address.55 FPGA.V7 | length 32.8
  Top Layer w0.2: EBI_address.55@132.842,145.669 140.818,153.645 140.818,163.754 145.047,167.983 FPGA.V7@145.047,173.407
FPGA.A03: EBI_address.53 FPGA.U7 | length 48.6
  Top Layer w0.2: FPGA.U7@145.047,174.207 145.061,174.193 145.466,174.193 v1(145.466,174.676)
  Mid-Layer 2 w0.2: EBI_address.53@135.382,145.669 135.382,144.856 135.23,144.704 129.642,144.704 129.337,145.009 129.337,146.71 134.518,151.892 141.783,151.892 144.628,154.737 144.628,159.944 145.364,160.68 145.364,174.676 v1(145.466,174.676)
FPGA.A04: EBI_address.51 FPGA.V8 | length 34.2
  Top Layer w0.2: EBI_address.51@137.922,145.669 138.887,144.704 141.021,144.704 141.427,145.11 141.427,148.615 145.847,153.035 FPGA.V8@145.847,173.407
FPGA.A05: EBI_address.49 FPGA.U8 | length 30.8
  Top Layer w0.2: EBI_address.49@140.462,145.669 140.462,152.286 145.44,157.264 145.44,173.558 145.847,173.965 FPGA.U8@145.847,174.207
FPGA.A06: EBI_address.47 FPGA.N8 | length 37.5
  Top Layer w0.2: EBI_address.47@143.002,145.669 146.456,149.123 146.456,159.715 146.915,160.174 148.674,160.174 148.674,164.879 v1(148.844,165.049) ; v1(145.415,177.013) 145.453,177.013 FPGA.N8@145.847,177.407
  Mid-Layer 1 w0.2: v1(145.415,177.013) 146.431,175.997 146.431,173.939 146.964,173.406 148.158,173.406 v1(148.641,172.923)
  Mid-Layer 2 w0.2: v1(148.641,172.923) 148.761,172.803 148.761,165.132 v1(148.844,165.049)
FPGA.A07: EBI_address.45 FPGA.M8 | length 34.3
  Top Layer w0.2: FPGA.M8@145.847,178.207 145.847,177.952 146.101,177.952 146.253,177.8 v1(147.041,177.8)
  Mid-Layer 2 w0.2: EBI_address.45@145.542,145.669 146.329,146.456 146.329,177.089 v1(147.041,177.8)
FPGA.A08: EBI_address.43 FPGA.V9 | length 29.3
  Top Layer w0.2: FPGA.V9@146.647,173.407 146.647,169.888 148.946,167.589 148.946,165.602 149.244,165.303 149.244,160.144 148.692,159.592 148.692,146.279 EBI_address.43@148.082,145.669
FPGA.A09: EBI_address.41 FPGA.T9 | length 31.8
  Top Layer w0.2: FPGA.T9@146.647,175.007 v1(147.046,175.407)
  Mid-Layer 2 w0.2: v1(147.046,175.407) 147.447,175.006 147.447,172.704 147.689,172.462 147.689,158.496 150.622,155.563 EBI_address.41@150.622,145.669
FPGA.A10: EBI_address.39 FPGA.T8 | length 33.8
  Top Layer w0.2: v1(145.466,174.6) 145.669,174.803 145.847,174.803 FPGA.T8@145.847,175.007
  Mid-Layer 2 w0.2: v1(144.932,157.607) 145.466,158.14 v1(145.466,174.6)
  Bottom Layer w0.2: v1(144.932,157.607) 144.932,152.984 152.248,145.669 EBI_address.39@153.162,145.669
FPGA.A11: EBI_address.37 FPGA.R8 | length 35
  Top Layer w0.2: v1(145.466,175.426) FPGA.R8@145.847,175.807
  Mid-Layer 1 w0.2: v1(145.466,175.426) 145.872,175.019 145.872,171.298 147.752,169.418 147.752,161.239 154.991,154 v1(155.702,154)
  Mid-Layer 2 w0.2: EBI_address.37@155.702,145.669 v1(155.702,154)
FPGA.A12: EBI_address.35 FPGA.V10 | length 32.2
  Top Layer w0.2: FPGA.V10@147.447,173.407 147.447,172.288 149.271,170.464 149.271,165.745 149.552,165.464 149.552,154.359 EBI_address.35@158.242,145.669
FPGA.A13: EBI_address.33 FPGA.U10 | length 39.7
  Top Layer w0.2: FPGA.U10@147.447,174.207 147.066,173.826 147.066,170.891 v1(148.361,169.596)
  Mid-Layer 2 w0.2: v1(148.361,169.596) 148.361,158.42 150.927,155.854 150.927,150.546 154.127,147.345 154.127,145.085 154.813,144.399 159.512,144.399 EBI_address.33@160.782,145.669
FPGA.A14: EBI_address.31 FPGA.T10 | length 44.9
  Top Layer w0.2: FPGA.T10@147.447,175.007 v1(147.854,174.6)
  Mid-Layer 2 w0.2: v1(147.854,174.6) 148.261,175.007 148.946,175.007 149.061,174.891 149.061,166.664 151.232,164.494 151.232,155.524 154.737,152.019 154.737,145.136 155.153,144.719 156.464,144.719 156.693,144.948 156.693,146.304 157.099,146.71 162.281,146.71 EBI_address.31@163.322,145.669